# Altium PCB MB1360.PcbDoc (part 3 of 3)
Units mil, origin at the board's own origin, x right, y up, seen from the top; angles counter-clockwise.
Board outline 2760.94 x 3253.06 mil, 2 copper layers (Top Layer, Bottom Layer), stack 61.811 mil thick; 138 components, 141 nets, 535 pads, 416 vias.
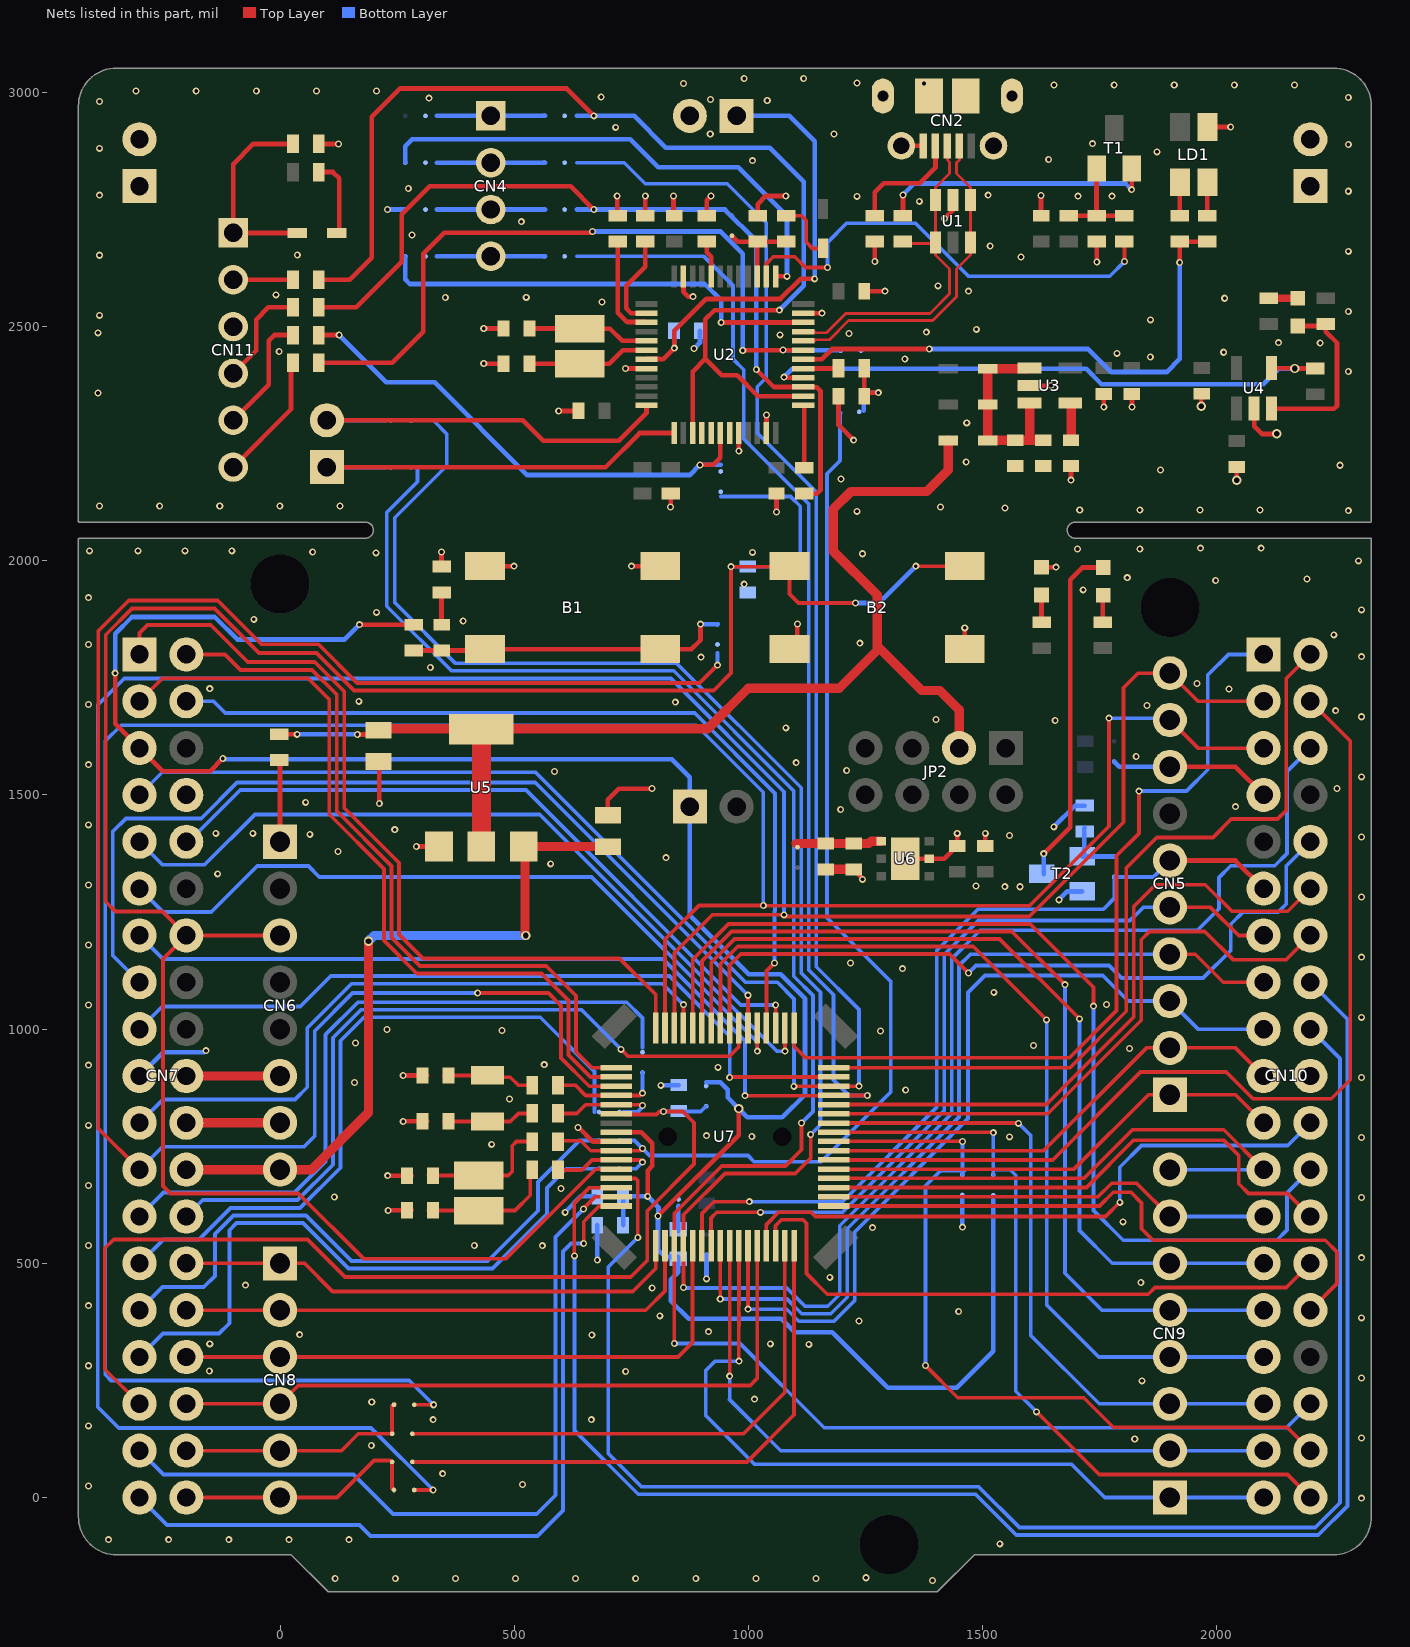
[diagram p2: the nets of this part, all layers, seen from the top]

## Via types
v1: diameter 15, hole 8, Top Layer to Bottom Layer, tented both sides, 398 vias
v2: diameter 20, hole 12, Top Layer to Bottom Layer, tented both sides, 18 vias

## Nets (pads, with @x,y where several pads share a name; then routed paths per layer and width w, separated by ;. In a path a pad name is that pad's centre, name@x,y a point inside that pad or via, vN(x,y) a via of type N, cw(c..) or ccw(c..) an arc to the next point about the centre after c; other vN are vias at no path point) (continued)
GND: B1.1 B1.2 B2.1 B2.2 C1.1 C2.1 C3.1 C4.1 C5.1 C6.1 C7.1 C8.2 C9.1 C10.1 C11.2 C12.1 C13.1 C14.1 C15.1 C17.1 C18.1 C19.1 C20.1 C21.1 C22.1 C23.1 C24.1 C25.1 C26.1 C27.2 C28.1 C30.1 C31.1 C32.1 CN2.5 CN2.6 CN2.7 CN2.8 CN2.9 CN2.10 CN2.11 CN6.6 CN6.7 CN7.8 CN7.19 CN7.20 CN7.22 CN10.20 CN11.3 JP1.2 JP4.1 JP4.2 JP5.1 JP5.2 LD1.1 LD3.2 R1.2 R3.1 R4.1 R5.1 R6.2 R8.2 R12.1 R21.1 R26.1 R35.2 SB10.2 SB30.2 SB31.1 T2.2 U1.2 U2.8 U2.20 U2.23 U2.35 U2.47 U3.2 U4.2 U5.1 U6.2 U6.EP U7.9 | length 3603.9
  Top Layer w10: R1.2@86.5,2890 v1(125,2890) ; C17.1@210,1571.54 212,1569.54 v1(212,1482.01) ; v1(230,687) C25.1@271.44,687 C25.1@281.28,687 ; v1(231,613) C26.1@271.44,613 C26.1@281.28,613 ; v1(263,803) C24.1@304.44,803 C24.1@314.28,803 ; v1(263,901) C23.1@304.44,901 C23.1@314.28,901 ; v1(291,1390) U5.1@337,1390 ; R26.1@345,1987.56 v1(345,2019) ; v1(435,2421) C5.1@477.44,2421 C5.1@485.32,2421 ; v1(435,2496) C4.1@477.44,2496 C4.1@485.32,2496 ; B1.1@437.99,1988.58 v1(499.58,1988.58) ; v1(595,2320) C10.1@633.5,2320 ; v1(636,790) 638.04,790 668.02,760.02 U7.9@698.75,760.02 ; C18.1@700,1456.46 700,1490.02 723,1513.02 793.02,1513.02 v1(794,1514) ; R3.1@720,2740.5 v1(720,2779) ; v1(737.53,2410.47) U2.8@782.68,2410.47 ; v1(750.42,1988.58) B1.2@812.01,1988.58 ; R4.1@780,2740.5 v1(780,2779) ; v1(834,2115) R21.1@834,2143.44 ; C1.1@840,2740.5 v1(840,2779) ; U2.47@861.42,2607.32 861.42,2575.04 862.23,2574.22 862.23,2573.57 871.8,2564 v1(881.63,2564) ; R5.1@911,2736.56 911,2770 v1(920,2779) ; v1(979.53,2234.17) U2.20@979.53,2272.68 ; R6.2@1020,2736.56 1020,2761.53 1037.47,2779 v1(1080,2779) ; U2.23@1038.58,2272.68 v1(1038.58,2311.18) ; v1(1060,2104) C15.1@1060,2139.5 ; B2.2@1104.72,1811.42 v1(1104.72,1865.28) ; U2.35@1117.32,2528.58 v1(1157.12,2528.58) ; C11.2@1192.44,2351 1192.44,2290 v1(1224.87,2257.56) ; C19.1@1225,1341.13 1243.5,1322.63 v1(1243.5,1320) ; C2.1@1251.5,2575.68 v1(1292,2575.68) ; v1(1270,2639) R8.2@1270,2677.5 ; CN2.7@1326.57,2886 CN2.5@1373.82,2886 ; v1(1335,1363.69) U6.2@1386.18,1363.69 1418.44,1363.69 C21.1@1446,1391.24 v1(1446,1418) ; v1@1419,2730 v1(1419,2731) 1437,2749 U1.2@1437,2770.28 U1.2@1437,2772.24 ; B2.1@1462.01,1811.42 v1(1462.01,1856.99) ; C22.1@1506,1391.24 v1(1506,1418) ; U3.2@1598.73,2374 U3.2@1600.7,2374 v1(1646,2374) ; LD3.2@1622.77,1983 LD3.2@1626,1986.23 v1(1657,1986.23) ; C3.1@1625,2740.5 v1(1625,2780) ; v1(1688.87,2172.13) C14.1@1688.87,2202.38 ; v1(1744,2638) R12.1@1744,2677.5 ; v1(1759.02,2328.45) C7.1@1759.02,2356.38 ; v1(1819.02,2328.61) C6.1@1819.02,2356.38 ; v2(1966.98,2330.02) C8.2@1966.98,2356.44 ; LD1.1@1979.53,2926.05 v1(2029.94,2926.05) ; v2(2043,2172) C9.1@2043,2200.44 ; U4.2@2080,2324.69 2080,2286.88 2096.1,2270.78 2128,2270.78 v2(2128,2271)
  Top Layer w20: CN7.22@-200,800 CN6.7@0,800 ; CN7.20@-200,900 CN6.6@0,900 ; C20.1@1165,1341.13 C19.1@1225,1341.13
  Bottom Layer w10: CN7.19@-300,900 -249.42,950.58 -161.42,950.58 v1(-158,954) ; v1(229.54,2750) SB10.2@267.25,2750 ; v1(609,609) 609,609.53 642.47,643 C31.1@673.5,643 ; v1(677.44,507) C32.1@677.44,581.62 ; v1@813.56,880.5 C30.1@851,880.5 ; v1(884,2453) 896.56,2465.56 C27.2@896.56,2491 ; v1(910.75,467) SB31.1@910.75,518.28 ; v1(1457,577.1) 1457,636.15 ; v1(1652.27,1432) 1697.45,1477.18 R35.2@1718,1477.18 ; v1(1663,1276) 1681,1294 T2.2@1713,1294
  other v1: 1393,-177 117.82,-173 246.16,-173 374.49,-173 502.83,-173 631.17,-173 759.5,-173 887.84,-173 1016.17,-173 1144.51,-173 1251,-171.34 1537.02,-99 -366,-90 -237.66,-90 -109.33,-90 19.01,-90 147.34,-90 2309,-1.36 -409,24.64 518,28 347.33,50.9 195,110.9 1825,125 2309,126.97 -409,152.97 327.01,166.22 664.77,166.22 195.91,204.05 1013,210 1840.67,249 2309,255.31 738,269 -151,270 -409,281.31 1129,327 -150,328 1047,328 665.77,346.8 42,347.6 915,354 1236,377 2309,383.64 811,388 1449,397 -409,409.64 794.53,447.5 -73.65,453.27 1838,459 1174,470 2309,511.98 -409,537.98 415,538 560,537.74 1265,576 1800,588.7 2309,640.32 116,641.53 600,660 -409,666.32 452,754 2309,768.65 1557.72,770 1007.38,771 910.77,772.42 -409,794.65 489.77,850.6 1336,870 813,879.94 159,886 2309,896.99 934.92,918.53 -409,922.99 564.2,924 1813.77,958.71 1609,965 161.37,970.42 1282,996 474,997 228.58,999 2309,1025.32 -409,1051.32 1764.49,1052.53 1524,1078.63 1329,1129 1218,1141 2309,1153.66 -409,1179.66 2309,1281.99 1547.48,1304.12 1580,1304 1486.14,1305.37 -409,1307.99 -132.96,1331.68 578,1353 824.06,1366 124,1379.44 2309,1410.33 1557.72,1413.41 63.58,1416 -137,1418 -58,1418 245,1425.83 -409,1436.33 1197,1469 2040,1475 54.93,1484.18 2257,1514 2309,1538.66 586,1550 1210,1552 -409,1564.66 1102.11,1569 1828,1582 1079.92,1643.46 1655,1659 1400.38,1661 2309,1667 2254,1680 1850.97,1690.79 -409,1693 844,1698 168.18,1700 2026.41,1726 -150,1727 1958,1738 321,1772 899,1794.1 2309,1795.34 -409,1821.34 1238,1824 2250,1842 391,1871.5 -56,1875 206,1890 2309,1895.34 -409,1921.34 1715,1938 991,1950 1997.92,1958 2193,1960.98 1809,1964 2303,2000 1243.5,2015 205,2017 1009,2018 69.65,2019 -407,2021.34 -303,2021.34 -203,2021.34 -103,2021.34 1703,2025 1835.91,2025 1965.49,2027 2095,2027 1231.77,2105.53 2281,2107 1707.57,2108.68 1835.91,2108.68 1964.25,2108.68 2092.58,2108.68 1548.04,2112.53 1410.18,2115 -385.34,2117 -257.01,2117 -128.67,2117 -0.34,2117 128,2117 1197.54,2174.53 1880,2193.87 2263.45,2204 1465,2210.8 1466.29,2294.48 -388.43,2358.34 2281,2403.99 1334,2431 1858.15,2435.09 1786.97,2442.95 2015,2445.25 -1.77,2447 2221,2465 2131.68,2465.65 1067.77,2482.53 1215.04,2485.28 -388.43,2486.67 1380,2488.13 1486.72,2494.15 1858.73,2514.53 -385.43,2524.01 2281,2532.33 687.77,2552.53 2017,2560.56 352.87,2562 525.77,2562.43 -8.43,2567.95 1470.03,2575.68 1405,2587 1582.21,2648.53 -385.43,2652.34 36.87,2652.94 2281,2660.66 1516.28,2672.07 282,2695.74 515.26,2724 1365,2767.57 1232,2778.17 1703.77,2778.53 1776.51,2778.53 -385.43,2780.68 1512,2780.68 2281,2789 274,2795 1008.94,2854.34 1641.29,2857 1872.7,2873.25 -385.43,2880.68 2281,2889 1734.77,2890.53 918.64,2911.2 1182.62,2911.2 716.77,2925.53 -385.43,2980.68 1040.32,2982.75 919.35,2985 317.99,2987.62 2281,2989 685.8,2990 -307.34,3003 -179.01,3003 -50.67,3003 77.66,3003 206,3003 1652.66,3016 1780.99,3016 1909.33,3016 2037.66,3016 2166,3016 861.66,3019 1375,3019 1232,3020 991,3030 1118,3030
LED_STLK: R14.1 R15.1 U2.30 | length 1176.4
  Top Layer w10: v1(1386.32,2452) 1178.7,2452 1156.85,2430.16 1143.63,2430.16 ; v1(1921,2637) R14.1@1921,2677.5 ; R14.1@1921,2681.44 R15.1@1980,2681.44 ; 1143.63,2430.16 U2.30@1117.32,2430.16 1143.63,2430.16
  Bottom Layer w10: v1(1386.32,2452) 1726,2452 1775,2403 1893,2403 1921,2431 v1(1921,2637)
NetB1_3: B1.3 B1.4 C16.2 R29.1 SB20.2 | length 683
  Top Layer w10: R29.1@290,1808.5 B1.3@451.81,1808.5 ; B1.3@454.72,1811.42 B1.4@812.01,1811.42 878.42,1811.42 897.88,1830.88 v1(897.88,1864.62)
  Bottom Layer w10: v1(897.88,1864.62) SB20.2@934.11,1864.62
NetC11_1: C11.1 R20.2 SB17.1 | length 155.6
  Top Layer w10: R20.2@1247.56,2411 C11.1@1247.56,2351 1255.56,2359 v1(1277.48,2359)
  Bottom Layer w10: 1246.09,2321 1246.09,2347.09 1258,2359 v1(1277.48,2359)
NetC12_2: C12.2 C13.2 D3.2 D4.2 D5.2 U3.1 U3.3 | length 436.5
  Top Layer w16: U3.3@1596.13,2334 U3.3@1598.73,2336.6 ; U3.3@1600.7,2336.6 U3.3@1601,2336.3 ; C13.2@1629.31,2257 C13.2@1629.87,2257.56
  Top Layer w20: D3.2@1511.13,2410 D5.2@1511.13,2334 D4.2@1511.13,2257 1601,2257 ; D3.2@1516.24,2410 U3.1@1597.33,2410 ; U3.3@1601,2336.3 1601,2257 ; C13.2@1629.31,2257 1601,2257
NetC14_2: C14.2 U3.4 | length 75.2
  Top Layer w20: C14.2@1689.28,2261.43 U3.4@1689.28,2336.6
NetC16_1: C16.1 R26.2 | length 57
  Top Layer w10: C16.1@345,1871.5 R26.2@345,1928.5
NetC19_2: C19.2 C20.2 SB1.1 U6.4 | length 183.6
  Top Layer w20: 1102.24,1396.24 C20.2@1165,1396.24 C19.2@1225,1396.24 1257.24,1396.24 1262.09,1401.09 U6.4@1283.82,1401.09
NetC23_2: C23.2 R31.2 X2.2 | length 188
  Top Layer w8: C23.2@349.72,901 C23.2@359.56,901 442.79,901 X2.2@443,901.21 ; X2.2@443,897.21 491.79,897.21 509,880 R31.2@530.5,880
NetC24_2: C24.2 R32.2 X2.1 | length 201.6
  Top Layer w8: C24.2@349.72,803 C24.2@359.56,803 442.79,803 X2.1@443,802.79 491.79,802.79 509,820 R32.2@530.5,820 ; R32.2@534.5,824 R32.2@530.5,820 ; R32.2@538.44,820 R32.2@530.5,820
NetC25_2: C25.2 R33.2 X3.2 | length 280.2
  Top Layer w8: C25.2@316.72,687 317.12,687.4 X3.2@424.5,687.4 487.4,687.4 496,696 496,751 505,760 R33.2@534.5,760
NetC26_2: C26.2 R34.2 X3.1 | length 286.1
  Top Layer w8: C26.2@316.72,613 317.12,612.6 X3.1@424.5,612.6 501.6,612.6 534.5,645.5 R34.2@534.5,700
NetCN2_4: CN2.4 R8.1 | length 244
  Top Layer w10: R8.1@1270,2740.5 1270,2787 1289,2806 1366,2806 1399.41,2839.41 CN2.4@1399.41,2885.79
NetCN4_1: CN4.1 SB6.1 SB7.2 | length 231.5
  Bottom Layer w10: 334.75,2950 CN4.1@450,2950 SB7.2@566.25,2950
NetCN4_2: CN4.2 SB8.1 SB9.2 | length 231.5
  Bottom Layer w10: 334.75,2850 CN4.2@450,2850 SB9.2@566.25,2850
NetCN4_3: CN4.3 SB10.1 SB11.2 | length 231.5
  Bottom Layer w10: 334.75,2750 CN4.3@450,2750 SB11.2@566.25,2750
NetCN4_4: CN4.4 SB12.1 SB13.2 | length 231.5
  Bottom Layer w10: 334.75,2650 CN4.4@450,2650 SB13.2@566.25,2650
NetCN5_8: CN5.8 CN10.7 SB21.1 | length 348.6
  Top Layer w10: CN5.8@1900,1560 2040,1560 CN10.7@2100,1500
  Bottom Layer w10: SB21.1@1781,1571.38 1792.38,1560 CN5.8@1900,1560
NetCN6_1: CN6.1 R30.2 | length 175.3
  Top Layer w10: R30.2@-2,1574.44 0,1572.44 CN6.1@0,1400
NetCN7_25: CN7.25 SB23.2 | length 1499.7
  Bottom Layer w8: CN7.25@-300,600 -249,651 30.75,651 97,717.25 97,988.25 166.25,1057.5 740.5,1057.5 774,1024 774,960.47
NetCN7_27: CN7.27 SB24.2 | length 1482.5
  Bottom Layer w8: CN7.27@-300,500 -249,551 -173,551 -106,618 43,618 129,704 129,975 179.5,1025.5 555.5,1025.5 671.53,909.47 671.53,823
NetCN7_29: CN7.29 SB25.2 | length 1299.9
  Bottom Layer w8: CN7.29@-300,400 -250.68,449.31 -162.68,449.31 -139,473 -139,562.37 -99.37,602 55.63,602 152.63,505 443.58,505 551,612.42 551,673.63 639.37,762 SB25.2@681.38,762
NetCN7_31: CN7.31 SB27.2 | length 1379.7
  Bottom Layer w8: CN7.31@-300,300 -250,350 -130,350 -108,372 -108,570.75 -92.75,586 49,586 146,489 453.62,489 570,605.38 570,660.69 611.31,702 SB27.2@684,702
NetCN7_36: CN7.36 CN8.5 SB2.1 SB4.2 | length 520.3
  Top Layer w8: CN7.36@-200,100 CN8.5@0,100 131,100 167,136 SB4.2@239.38,136 239.38,195.06 SB2.1@244.32,200
NetCN7_38: CN7.38 CN8.6 SB3.2 SB5.1 | length 529.4
  Top Layer w8: CN7.38@-200,0 CN8.6@0,0 122,0 201,79 235,79 ; SB3.2@239.38,76 239.38,19.94 SB5.1@243.32,16
NetCN11_1: CN11.1 D1.1 R1.1 | length 420.1
  Top Layer w10: R1.1@23.5,2890 -57,2890 -100,2847 CN11.1@-100,2700 D1.1@31.76,2700
NetCN11_2: CN11.2 R9.1 | length 123.5
  Top Layer w10: CN11.2@-100,2600 R9.1@23.5,2600
NetCN11_4: CN11.4 R16.1 | length 220.6
  Top Layer w10: CN11.4@-100,2400 -51,2449 -51,2515 -25,2541 R16.1@23.51,2541
NetCN11_5: CN11.5 R17.1 | length 254
  Top Layer w10: CN11.5@-100,2300 -24,2376 -24,2470 -12,2482 R17.1@23.51,2482
NetCN11_6: CN11.6 R19.1 | length 274.2
  Top Layer w10: CN11.6@-100,2200 23.51,2323.51 R19.1@23.51,2423
NetD1_2: D1.2 R2.1 | length 162
  Top Layer w10: R2.1@86.5,2830 113,2830 126.24,2816.76 D1.2@126.24,2700
NetD2_2: D2.2 R7.1 | length 133.7
  Top Layer w8: R7.1@1081,2736.56 1113.3,2736.56 1123.57,2726.29 1123.57,2680.46 1137.15,2666.87 D2.2@1159,2666.87
NetL1_2: L1.2 SB28.1 | length 54.2
  Bottom Layer w10: L1.2@850,568.5 L1.2@850,572.5 850,621.25 851,622.25
NetLD1_2: LD1.2 R15.2 | length 67.6
  Top Layer w10: LD1.2@1979.53,2807.94 1979.53,2740.97 R15.2@1980,2740.5
NetLD1_3: LD1.3 R14.2 | length 66.9
  Top Layer w10: R14.2@1921,2740.5 LD1.3@1921,2807.42
NetLD2_1: LD2.1 R18.1 | length 62
  Top Layer w16: R18.1@2111,2560.56 LD2.1@2172.97,2560.56
NetLD2_2: LD2.2 R36.1 U4.3 | length 386.2
  Top Layer w10: U4.3@2117.4,2324.69 2250.4,2324.69 2257,2331.29 2257,2465 2232.64,2489.36 R36.1@2232.64,2501.47 ; LD2.2@2173,2501.47 R36.1@2232.64,2501.47 ; R36.1@2232.64,2505.44 R36.1@2232.64,2501.47
NetLD3_1: LD3.1 R27.2 | length 58.6
  Top Layer w10: R27.2@1626,1868.56 LD3.1@1626,1927.17
NetLD4_1: LD4.1 R28.1 | length 58
  Top Layer w10: R28.1@1757,1868.86 1757,1925.47 LD4.1@1758,1926.47
NetLD4_2: LD4.2 T2.3 | length 733.5
  Top Layer w10: v1(1630.69,1374.69) 1687,1431 1687,1959.31 1713.21,1985.53 LD4.2@1758,1985.53
  Bottom Layer w10: T2.3@1630.69,1331 v1(1630.69,1374.69)
NetR3_2: R3.2 U2.3 | length 221.5
  Top Layer w10: R3.2@721,2681.44 721,2530 741.32,2509.68 U2.3@780,2509.68 ; U2.3@780,2508.9 U2.3@782.68,2508.9
NetR4_2: R4.2 U2.2 | length 207.4
  Top Layer w10: R4.2@780,2681.44 780,2628 739,2587 739,2539 749.42,2528.58 U2.2@782.68,2528.58
NetR5_2: R5.2 U2.44 | length 78
  Top Layer w10: R5.2@911,2681.44 911,2658.47 920.47,2649 U2.44@920.47,2607.32
NetR6_1: R6.1 R7.2 SB15.2 U2.39 | length 189.3
  Top Layer w10: SB15.2@965,2694.09 977.65,2681.44 R6.1@1020,2681.44 R7.2@1080,2681.44 ; U2.39@1018.9,2607.32 R6.1@1018.9,2676.4
NetR10_2: R10.2 T1.2 | length 595.8
  Top Layer w10: R10.2@1330,2740.5 v1(1330,2781) ; v1@1817,2791 v1(1818.4,2792.4) T1.2@1818.4,2837.69 ; T1.2@1820.58,2837.69 T1.2@1820.58,2841.63
  Bottom Layer w10: v1(1330,2781) 1354.58,2805.58 1805.22,2805.58 v1(1818.4,2792.4)
NetR11_1: R11.1 R12.2 R13.1 T1.1 | length 224.1
  Top Layer w10: R11.1@1684,2736.56 R13.1@1803,2736.56 ; R12.2@1743.42,2736.56 T1.1@1743.42,2841.63
NetR20_1: R20.1 U2.29 | length 75.3
  Top Layer w10: U2.29@1117.32,2410.47 1191.91,2410.47 R20.1@1192.44,2411
NetR35_1: R35.1 SB22.1 T2.1 | length 130.2
  Bottom Layer w10: T2.1@1713,1368.8 T2.1@1717.31,1368.8 ; T2.1@1717.31,1368.4 T2.1@1717.31,1368.8 ; R35.1@1718,1430.13 1717.31,1429.43 T2.1@1717.31,1368.8 ; SB22.1@1781,1368.31 1780.5,1368.8 T2.1@1717.31,1368.8
NetSB14_2: SB14.2
OSC_IN: C4.2 U2.5 X1.1 | length 268.1
  Top Layer w10: C4.2@524.69,2496 C4.2@532.56,2496 X1.1@639.4,2496 ; X1.1@640,2495.4 704.6,2495.4 730.47,2469.53 U2.5@782.68,2469.53
OSC_OUT: C5.2 U2.6 X1.2 | length 269.7
  Top Layer w10: C5.2@524.69,2421 C5.2@532.56,2421 X1.2@639.6,2421 ; X1.2@640,2420.6 702.6,2420.6 731.84,2449.84 U2.6@782.68,2449.84
PA0: CN7.28 CN8.1 U7.17 | length 1095.9
  Top Layer w8: CN7.28@-200,500 CN8.1@0,500 52.35,500 112.35,440 753,440 802.23,489.23 U7.17@802.23,537.66
PA1: CN7.30 CN8.2 U7.18 | length 1135.6
  Top Layer w8: CN7.30@-200,400 CN8.2@0,400 781,400 821.91,440.91 U7.18@821.91,537.66
PA2: CN10.34 SB18.1 U7.19 | length 4209.3
  Top Layer w8: U7.19@841.6,537.66 841.5,537.56 841.5,329.5 v1(842,329) ; U7.19@841.73,537.72 841.73,606.54 943.19,708 1079,708 1113.5,742.5 v1(1113.5,799.5)
  Bottom Layer w8: 293.75,2200 293.75,2168.75 228,2103 228,1903 366,1765 840.63,1765 1096.86,1508.77 1096.86,1113.14 1138,1072 1138,824 v1(1113.5,799.5) ; v1(842,329) 982,329 1162,149 2149,149 CN10.34@2200,200
PA3: CN10.6 SB16.1 U7.20 | length 5075.5
  Top Layer w8: U7.20@861,537.38 U7.20@861.28,537.66 ; v1(861.42,448.14) U7.20@861.42,537.72 861.42,603.6 949.82,692 1100,692 1133,725 v1(1133,775)
  Bottom Layer w8: 293.75,2300 327,2300 356,2271 356,2203 245,2092 245,1911 375,1781 847.25,1781 1112.86,1515.4 1112.86,1119.77 1154,1078.63 1154,796 v1(1133,775) ; v1(861.42,448.14) 862.06,447.5 1081.78,447.5 1120.78,408.5 1169.5,408.5 1195,434 1195,580.25 1434,819.25 1434,1150 1495,1211 1959,1211 2005,1257 2005,1324 2030,1349 2124,1349 2150,1375 2150,1550 CN10.6@2200,1600
PA4: CN7.32 CN8.3 U7.21 | length 1300.5
  Top Layer w8: CN7.32@-200,300 CN8.3@0,300 849.97,300 880.97,331 U7.21@880.97,537.66
PA5: CN5.6 CN10.11 SB22.2 U7.22 | length 1825.4
  Top Layer w8: U7.22@900.79,537.72 900.79,606.21 926.17,631.6 v1(1002,631.6)
  Top Layer w10: CN5.6@1900,1360 CN5.6@1900,1360 2040,1360 CN10.11@2100,1300
  Bottom Layer w8: v1(1002,631.6) 1201.09,631.6 1402,832.51 1402,1167.17 1490.62,1255.79 1758,1255.79 1781,1278.79 SB22.2@1781,1322.38 ; SB22.2@1781,1325 1865,1325 CN5.6@1900,1360
PA6: CN5.5 CN10.13 U7.23 | length 1733.2
  Top Layer w8: U7.23@920.47,537.72 920.47,596.8 932.68,609 v1(1026,609) ; CN5.5@1900,1260 1987,1260 2047,1200 CN10.13@2100,1200
  Bottom Layer w8: v1(1026,609) 1201.12,609 1418,825.88 1418,1158.87 1491.13,1232 1815,1232 1843,1260 CN5.5@1900,1260
PA7: CN5.4 CN10.15 U7.24 | length 1904.7
  Top Layer w8: v1(940,424) 940,537.56 U7.24@940.16,537.72 ; CN5.4@1900,1160 1954,1160 2014,1100 CN10.15@2100,1100
  Bottom Layer w8: v1(940,424) 1082.65,424 1114.15,392.5 1176.13,392.5 1211,427.37 1211,573.63 1450,812.63 1450,1136 1474,1160 CN5.4@1900,1160
PA8: CN9.8 CN10.23 U7.36 | length 1195.8
  Top Layer w8: U7.36@1182.28,681.42 1716.42,681.42 1820,785 2015,785 CN10.23@2100,700
  Bottom Layer w8: CN9.8@1900,700 CN10.23@2100,700
PA9: CN5.1 CN10.21 U7.37 | length 1008.4
  Top Layer w8: U7.37@1182.28,701.1 1695.38,701.1 1854.27,860 CN5.1@1900,860 2040,860 CN10.21@2100,800
PA10: CN9.3 CN10.33 U7.42 | length 1416.3
  Top Layer w8: U7.42@1182.34,799.39 1576.41,799.39 v1(1576.8,799)
  Bottom Layer w8: v1@1576.41,799 v1@1576.41,799.39 ; v1(1576.8,799) 1603,772.8 1603,346 1749,200 CN9.3@1900,200 CN10.33@2100,200
PA11: CN10.14 U7.43 | length 1325.8
  Top Layer w8: U7.43@1182.28,819.21 1639.09,819.21 1839,1019.12 1839,1191 1856.42,1208.42 1974.58,1208.42 2034.58,1148.42 2148.42,1148.42 CN10.14@2200,1200
PA12: CN10.12 U7.44 | length 1394.2
  Top Layer w8: U7.44@1182.28,838.9 1636.15,838.9 1823,1025.75 1823,1262 1869.42,1308.42 1975.58,1308.42 2032.42,1251.58 2151.58,1251.58 CN10.12@2200,1300
PA13: CN7.13 SB13.1 U7.45 | length 3994.3
  Top Layer w8: v1(993,858) 1181.9,858 1182.34,858.45 v1(1253.97,858.45)
  Bottom Layer w8: CN7.13@-300,1200 -250,1150 817.63,1150 993,974.63 v1(993,858) ; 633.75,2650 905,2650 967,2588 967,2430.91 990,2407.91 990,2260 1128.86,2121.14 1128.86,1126.4 1182,1073.25 1182,891.45 1215,858.45 v1(1253.97,858.45)
PA14: CN7.7 SB9.1 U7.46 | length 4343
  Top Layer w8: v1(1097,878) 1236,878 v1(1236.13,878.13)
  Bottom Layer w8: CN7.7@-300,1500 -251.58,1548.42 545.58,1548.42 994,1100 1061.92,1100 1097.59,1064.33 1097.59,878.59 v1(1097,878) ; 633.75,2850 735,2850 780,2805 955,2805 1038.28,2721.72 1038.28,2391 1019.08,2371.8 1019.08,2272.92 1144.86,2147.14 1144.86,1133.02 1236,1041.88 1236,878.26 v1(1236.13,878.13)
PA15: CN7.17 U7.47 | length 1670.5
  Top Layer w8: v1@960,897.81 U7.47@1182.34,897.81
  Bottom Layer w8: CN7.17@-300,1000 -251.58,1048.42 43.42,1048.42 108.37,1113.37 831.63,1113.37 960,985 v1(960,897)
PB0: CN5.3 CN10.17 U7.27 | length 1844
  Top Layer w8: v1(999,402) 999,537.5 U7.27@999.21,537.72
  Bottom Layer w8: v1(999,402) 1082.03,402 1107.53,376.5 1182.75,376.5 1227,420.75 1227,567 1469,809 1469,1078.5 1505,1114.5 1756.5,1114.5 1811,1060 CN5.3@1900,1060 1960,1000 CN10.17@2100,1000
PB1: CN7.34 CN8.4 U7.28 | length 1524.9
  Top Layer w8: CN7.34@-200,200 -16,200 CN8.4@-16,184 ; CN8.4@0,200 39,239 1004,239 1018.76,253.76 U7.28@1018.76,537.66
PB2: CN10.22 U7.29 | length 1348.1
  Top Layer w8: U7.29@1038.44,537.66 1038.44,583.07 1064.37,609 1134,609 1143,600 1762.65,600 v1(1793,630.35)
  Bottom Layer w8: v1(1793,630.35) 1793,705.13 1839.46,751.58 2151.58,751.58 CN10.22@2200,800
PB3: CN9.4 CN10.31 U7.57 | length 2032.1
  Top Layer w8: U7.57@940.3,1002.34 940.3,1139.55 977.25,1176.5 1480,1176.5 v1(1636.5,1020) v1@1637.16,1020
  Bottom Layer w8: v1@1637.16,1020 1637.16,410.84 1748,300 CN9.4@1900,300 CN10.31@2100,300
PB4: CN9.6 CN10.27 U7.58 | length 1891.9
  Top Layer w8: U7.58@920.61,1002.34 920.61,1142.49 970.62,1192.5 1536.5,1192.5 v1(1707,1022)
  Bottom Layer w8: v1(1707,1022) 1707,570 1777,500 CN9.6@1900,500 CN10.27@2100,500
PB5: CN9.5 CN10.29 U7.59 | length 2064
  Top Layer w8: U7.59@900.93,1002.34 900.93,1145.43 963.99,1208.5 1562.5,1208.5 v1(1676,1095)
  Bottom Layer w8: v1(1676,1095) 1676,479 1755,400 CN9.5@1900,400 CN10.29@2100,400
PB6: CN10.24 U7.60 | length 2164
  Top Layer w8: U7.60@881.24,1002.34 881.24,1148.38 957.36,1224.5 1601.82,1224.5 1737,1089.31 v1(1737,1049)
  Bottom Layer w8: v1(1737,1049) 1737,612.75 1800.5,549.25 2128.41,549.25 2150,570.84 2150,650 CN10.24@2200,700
PB7: CN7.21 U7.61 | length 1427.2
  Top Layer w8: U7.61@861.56,1002.34 v1(861.56,1052.29)
  Bottom Layer w8: CN7.21@-300,800 -250,850 32,850 58,876 58,1002.63 152.37,1097 816.84,1097 v1(861.56,1052.29)
PB8: CN5.10 CN10.3 SB5.2 U7.62 | length 6012.1
  Top Layer w8: SB5.2@286.62,16 v1(327,16) ; U7.62@841.87,1002.34 U7.62@842.06,1002.53 ; U7.62@842.06,1032.53 842.06,1163.05 923,1244 v1(1076,1244) 1079.5,1240.5 1599.92,1240.5 1801,1441.58 1801,1729 1832,1760 CN5.10@1900,1760 1960,1700 CN10.3@2100,1700
  Bottom Layer w8: v1(327,16) 194.58,148.42 -344.42,148.42 -389,193 -389,1691.9 -332.48,1748.42 834.58,1748.42 1076,1507 v1(1076,1244)
PB9: CN5.9 CN10.5 SB2.2 U7.63 | length 5630.8
  Top Layer w8: 293,198 v1(328,198) ; U7.63@822.18,1032.34 822.18,1191.89 894.3,1264 v1(1032,1264) 1032.5,1263.5 1600.3,1263.5 1770,1433.2 v1(1770,1664) ; CN5.9@1900,1660 1960,1600 CN10.5@2100,1600
  Bottom Layer w8: v1(328,198) 276,250 -361,250 -373,262 -373,1615 -338.94,1649.06 44.64,1649.06 44.7,1649 888.75,1649 1032,1505.75 v1(1032,1264) ; v1(1770,1664) 1896,1664 CN5.9@1900,1660
PB10: CN10.28 U7.30 | length 1345.7
  Top Layer w8: U7.30@1058.13,537.66 1058.13,580.13 1071,593 1116.65,593 1124,585.65 1124,478.35 1168.35,434 1854,434 1868.42,448.42 2148.42,448.42 CN10.28@2200,500
PB11: SB4.1 U7.31 | length 1175.2
  Top Layer w8: SB4.1@282.68,136 989.83,136 1077.82,223.98 U7.31@1077.82,567.66
PB12: SB3.1 U7.32 | length 1241.3
  Top Layer w8: 289,76 997,76 1097.5,176.5 U7.32@1097.5,567.66
PB13: CN10.30 U7.33 | length 1319.5
  Top Layer w8: U7.33@1182.28,622.36 1749.78,622.36 1779,651.58 1816.73,651.58 1839.32,629 1839.32,573.93 1864,549.25 2231.75,549.25 2257,524 2257,457 CN10.30@2200,400
PB14: CN9.7 CN10.25 U7.34 | length 986.1
  Top Layer w8: U7.34@1182.28,642.05 1724.67,642.05 1746.84,642.05 1775.79,671 1829,671 CN9.7@1900,600 ; CN10.25@2073,600 CN10.25@2100,600
  Bottom Layer w8: CN9.7@1900,600 CN10.25@2100,600
PB15: CN10.26 U7.35 | length 1162.5
  Top Layer w8: U7.35@1182.28,661.73 1721.73,661.73 1823,763 2014.37,763 2047,730.37 2047,670 2068,649 2151,649 CN10.26@2200,600
PC0: CN10.18 U7.13 | length 3343.9
  Top Layer w8: U7.13@717.66,681.28 759.35,681.28 764,676.63 v1(764,555)
  Bottom Layer w8: v1(764,555) 701,492 701,93.63 771.63,23 1491.63,23 1578.63,-64 2210.37,-64 2263,-11.37 2263,937 CN10.18@2200,1000
PC1: CN10.16 U7.14 | length 3507.7
  Top Layer w8: v1(629,516) 628.5,516.5 628.5,629.03 661.07,661.6 U7.14@717.66,661.6
  Bottom Layer w8: v1(629,516) 629,143 765,7 1485,7 1572,-80 2217,-80 2279,-18 2279,1021 CN10.16@2200,1100
PC2: CN7.35 U7.15 | length 1677.5
  Top Layer w8: v1(648,616) 648,617.29 672.62,641.91 U7.15@717.66,641.91
  Bottom Layer w8: CN7.35@-300,100 -249,49 157.17,49 241.17,-35 548,-35 588,5 588,556 v1(648,616)
PC3: CN7.37 U7.16 | length 1685.8
  Top Layer w8: v1@649,541.91 v1(648.34,542.56) 648.34,588.94 655.9,596.5 656.08,596.5 667.5,607.92 667.5,608.1 681.63,622.23 U7.16@708,622.23
  Bottom Layer w8: CN7.37@-300,0 -241.34,-58.66 169.66,-58.66 193,-82 550,-82 604,-28 604,525 621.56,542.56 v1(648.34,542.56)
PC4: CN9.2 CN10.35 U7.25 | length 1514.1
  Top Layer w8: U7.25@959.84,537.72 960,537.56 v1(960,259)
  Bottom Layer w8: v1(960,259) 960,209.31 959.84,209.16 1069,100 CN9.2@1900,100 CN10.35@2100,100
PC5: CN9.1 CN10.37 U7.26 | length 1686.4
  Top Layer w8: U7.26@979.53,537.72 980,537.24 980,410.58 979.5,410.08 979.5,393.92 980,393.42 980,366.58 979.71,366.29 979.71,291.29 v1(980,291)
  Bottom Layer w8: v1(980,291) 929,291 909,271 909,174.84 1012.84,71 1690,71 1761,0 CN9.1@1900,0 CN10.37@2100,0
PC6: CN10.4 U7.38 | length 2063.9
  Top Layer w8: U7.38@1182.28,720.79 1649.79,720.79 1837.42,908.42 2020.58,908.42 2077.42,851.58 2244.58,851.58 2285,892 2285,1615 CN10.4@2200,1700
PC7: CN5.2 CN10.19 U7.39 | length 1033.5
  Top Layer w8: U7.39@1182.28,740.47 1630.47,740.47 1850,960 CN5.2@1900,960 2040,960 CN10.19@2100,900
PC8: CN10.2 U7.48 | length 1727.3
  Top Layer w8: U7.48@1182.28,917.64 1686.64,917.64 1807,1038 1807,1344 1872,1409 1991.82,1409 2031.24,1448.42 2129.83,1448.42 2148.42,1467 2148.42,1748.42 CN10.2@2200,1800
PC9: CN10.1 U7.49 | length 1772.6
  Top Layer w8: U7.49@1097.77,1002.34 1097.77,963.22 1122,939 1685.37,939 1786,1039.63 1786,1370 1834,1418 v1(1834,1508)
  Bottom Layer w8: v1(1834,1508) 1834.42,1508.42 1935.42,1508.42 1981,1554 1981,1756 2025,1800 CN10.1@2100,1800
PC10: CN7.1 U7.64 | length 1789.1
  Top Layer w8: CN7.1@-300,1800 -300,1846 -283,1863 -148,1863 -69,1784 74,1784 137,1721 137,1472.25 254,1355.25 254,1202.25 305.25,1151 725,1151 802.5,1073.5 U7.64@802.5,1002.34
PC11: CN7.2 U7.1 | length 1588.6
  Top Layer w8: CN7.2@-200,1800 -117.5,1800 -84.5,1767 68.37,1767 121,1714.37 121,1465.63 238,1348.63 238,1195.63 298.63,1135 568.31,1135 632,1071.31 632,951.63 666.13,917.5 U7.1@717.66,917.5
PC12: CN7.3 U7.2 | length 1691.8
  Top Layer w8: CN7.3@-300,1700 -251,1749 60,1749 105,1704 105,1459 222,1342 222,1189 292,1119 558.24,1119 616,1061.24 616,945 663.18,897.82 U7.2@717.66,897.82
PC13: CN7.23 SB20.1 U7.3 | length 4103.4
  Top Layer w8: CN7.23@-300,700 -388,788 -388,1850.04 -323.04,1915 -132.96,1915 -39.72,1821.76 81.91,1821.76 164.67,1739 895.91,1739 v1(934.11,1777.2) ; v1(422,1077) 573,1077 600,1050 600,938.37 660.24,878.13 U7.3@717.66,878.13
  Bottom Layer w8: CN7.23@-300,700 -251,749 51,749 74,772 74,996 155,1077 v1(422,1077) ; v1(934.11,1777.2) 934.11,1803.6
PC14: R31.1 SB23.1 U7.4 | length 231.5
  Top Layer w8: R31.1@597.5,880 631,880 652.55,858.45 769.24,858.45 v1(774,863.21)
  Bottom Layer w8: v1(774,863.21) SB23.1@774,907.31
PC15: R32.1 SB24.1 U7.5 | length 233.9
  Top Layer w8: R32.1@597.5,820 633.79,820 652.55,838.76 771.32,838.76 v1@774,836.08
  Bottom Layer w8: 733,823 763,823 774,834 v1(774,837)
PD0: CN7.9 U7.50 | length 1701.6
  Top Layer w8: v1(1078.09,953) U7.50@1078.09,1002.34
  Bottom Layer w8: CN7.9@-300,1400 -251,1351 -161,1351 -53.5,1458.5 554.38,1458.5 983.13,1029.75 984.25,1029.75 1061,953 v1(1078.09,953)
PD1: CN7.10 U7.51 | length 1543.5
  Top Layer w8: U7.51@1058.41,1002.34 v1(1058.41,1051.69)
  Bottom Layer w8: CN7.10@-200,1400 -195.37,1400 -84.9,1510.47 525.04,1510.47 983.82,1051.69 v1(1058.41,1051.69)
PD2: CN7.4 U7.52 | length 1847.1
  Top Layer w8: U7.52@1038.72,1002.34 1039,1002.62 1039,1043.52 1038.91,1043.62 1038.91,1123.9 v1(1056,1141)
  Bottom Layer w8: CN7.4@-200,1700 -141.94,1700 -116.94,1675 885.37,1675 1057,1503.37 1057,1252.58 1056,1251.58 v1(1056,1141)
PD3: CN7.11 U7.53 | length 1605
  Top Layer w8: v1(1019.03,952.96) U7.53@1019.03,1002.34
  Bottom Layer w8: CN7.11@-300,1300 -250,1250 -147,1250 -48.58,1348.42 60.58,1348.42 84,1325 665.25,1325 976.51,1013.75 977.62,1013.75 1019.03,972.34 v1(1019.03,952.96)
PD4: CN7.15 U7.54 | length 2004.5
  Top Layer w8: v1(999,1072.37) 999,1002.69 U7.54@999.35,1002.34
  Bottom Layer w8: CN7.15@-300,1100 -357,1157 -357,1422 -329,1450 -168,1450 -91.53,1526.47 544.9,1526.47 v1(999,1072.37) v1@999,1071
PD5: CN7.26 U7.55 | length 1611.3
  Top Layer w8: v1(728,957) 743,942 960,942 979.67,961.66 U7.55@979.67,1002.34
  Bottom Layer w8: CN7.26@-200,600 -165,635 37.37,635 113,710.63 113,981.63 172.87,1041.5 643.5,1041.5 v1(728,957)
PD6: CN10.10 U7.56 | length 1619.7
  Top Layer w8: U7.56@959.98,1002.34 959.98,1136.61 983.87,1160.5 1429.5,1160.5 v1(1470,1120)
  Bottom Layer w8: v1(1470,1120) 1486,1136 1770,1136 1797,1109 1970.86,1109 2030,1168.14 2030,1224 2056,1250 2131.42,1250 2148.42,1267 2148.42,1348.42 CN10.10@2200,1400
PD8: CN10.36 SB30.1 U7.40 | length 1723.9
  Top Layer w8: U7.40@1182.34,760.02 1182.98,760.65 v1@1457,760.65 ; v1(1378,282) 1447,213 1716,213 1779,150 2150,150 CN10.36@2200,100
  Bottom Layer w8: v1(1378,282) 1378,665.42 1410.63,698.04 1457,698.04 ; SB30.1@1457,689.31 1457,698.04 ; v1(1457,760) 1457,698.04 ; 1462,698.04 1457,698.04
PD9: CN10.38 SB29.1 U7.41 | length 1672.6
  Top Layer w8: U7.41@1182.34,779.5 1182.34,779.71 v1@1523,779.71 ; v1(1615,183) 1749,49 2151,49 CN10.38@2200,0
  Bottom Layer w8: SB29.1@1523,688.69 1523,700 ; v1@1524,780 v1(1523,779) 1523,700 ; v1@1618,183 v1(1615,183) 1571,227 1571,688 1559,700 1523,700
PF0: R33.1 SB17.2 SB25.1 U7.10 | length 2367.7
  Top Layer w8: R33.1@597.5,761.89 642.11,761.89 663.66,740.34 769.24,740.34 v1(774,745.1)
  Bottom Layer w8: SB25.1@724.68,762 757.1,762 v1(774,745.1) 789.1,730 999,730 1012,717 1155,717 1304,866 1304,1102 1168,1238 1168,2186 1195.5,2213.5 SB17.2@1195.5,2315.72
  Bottom Layer w10: SB17.2@1193.22,2318 SB17.2@1195.5,2315.72
PF1: R34.1 SB27.1 U7.11 | length 234.2
  Top Layer w8: R34.1@597.5,699.1 644.52,699.1 666.08,720.65 769.24,720.65 v1(774,715.89)
  Bottom Layer w8: 733,702 760.11,702 v1(774,715.89)
PF2: B2.3 B2.4 C28.2 CN6.3 CN7.14 SB19.2 U7.12 | length 5360
  Top Layer w8: CN6.3@0,1200 CN7.14@-200,1200 ; U7.12@717.66,700.97 673.39,700.97 482.42,510 178,510 39,649 -234,649 -250,665 -250,1150 CN7.14@-200,1200 ; v1(1229,1910) 1107,1910 1087.99,1929.01 B2.4@1087.99,1988.58 1086.94,1987.53 v1(963.15,1987.53) 963.15,1760.15 926,1723 158.05,1723 78.05,1803 -45,1803 -140,1898 -316,1898 -372,1842 -372,1272 -351,1251 -251,1251 CN7.14@-200,1200 ; v1(1357.58,1988.58) B2.3@1462.01,1988.58
  Bottom Layer w8: 941,2137.25 1090.12,2137.25 1111,2116.37 1111,1999 1099.53,1987.53 C28.2@999,1987.53 v1(963.15,1987.53)
  Bottom Layer w10: v1(1229,1910) 1279,1910 v1(1357.58,1988.58)
PWR_ENN: R24.1 U2.28 U4.4 | length 1260.5
  Top Layer w10: v1(1076,2392) 1077.21,2390.79 U2.28@1117.32,2390.79 ; U4.4@2117.4,2411.31 2166,2411.31 v2(2166.75,2410.56) R24.1@2210,2410.56
  Bottom Layer w10: v1(1076,2392) 1094,2410 1721,2410 1754,2377 2099.83,2377 2133.39,2410.56 v2(2166.75,2410.56)
STL_USB_D_N: CN2.2 U1.1 U1.6 U2.32 | length 714.6
  Top Layer w6.1: U2.32@1117.32,2469.53 1141,2469.53 1143.35,2471.87 1173.04,2471.87 1214.17,2513 1393.71,2513 1444.5,2563.79 1444.5,2623.1 1474.4,2653 U1.6@1474.4,2679.72 U1.1@1474.4,2770.28 1474.4,2797 1444.5,2826.9 1444.5,2849 ; 1444.5,2849.91 1450.59,2856 CN2.2@1450.59,2885.79
STL_USB_D_P: CN2.3 R10.1 U1.3 U1.4 U2.33 | length 757.2
  Top Layer w6.1: U2.33@1117.32,2489.21 1141,2489.21 1143.35,2486.87 1166.82,2486.87 1207.95,2528 1387.5,2528 1429.5,2570 1429.5,2623.1 1399.6,2653 U1.4@1399.6,2677.76 ; R10.1@1330,2677.5 1399.35,2677.5 U1.4@1399.6,2677.76 ; CN2.3@1425,2885.79 1425,2856 1429.5,2851.5 ; 1429.5,2849 1429.5,2826.9 1399.6,2797 U1.4@1399.6,2677.76
STLK_RX: JP6.1 SB18.2 U2.13 | length 898.1
  Top Layer w10: JP6.1@100,2200 695,2200 767.68,2272.68 U2.13@841.73,2272.68
  Bottom Layer w10: JP6.1@100,2200 226.25,2200
STLK_TX: JP6.2 SB16.2 U2.12 | length 867.9
  Top Layer w10: JP6.2@100,2300 517.89,2300 561.89,2256 723,2256 782.68,2315.68 U2.12@782.68,2331.73
  Bottom Layer w10: JP6.2@100,2300 226.25,2300
STM_JTCK: SB8.2 U2.37 | length 1077.4
  Top Layer w10: U2.37@1058.27,2607.32 v1(1082.68,2607.32)
  Bottom Layer w10: SB8.2@267.25,2850 267.25,2885.25 282,2900 748,2900 808,2840 978,2840 1082.68,2735.32 v1(1082.68,2607.32)
STM_JTMS: SB12.2 U2.34 | length 964.9
  Top Layer w10: v1(942,2509) 942.1,2508.9 U2.34@1117.32,2508.9
  Bottom Layer w10: SB12.2@267.25,2650 267.25,2600.75 277,2591 907,2591 942,2556 v1(942,2509)
STM_RST: C27.1 JP1.1 U2.7 | length 1031.5
  Top Layer w10: 811.68,2430.94 783.46,2430.94 U2.7@782.68,2430.16 ; 813.23,2430.16 U2.7@782.68,2430.16 ; v1(1141.64,2602) 1111.57,2602 1068.57,2559 910.08,2559 842,2490.92 v1(842,2454) 818.16,2430.16 U2.7@782.68,2430.16
  Bottom Layer w10: C27.1@841.44,2491 841.44,2454.56 v1(842,2454) ; JP1.1@975,2950 1087,2950 1141.64,2895.36 v1(1141.64,2602)
T_JRST: U2.19
T_JTCK: R9.2 SB7.1 U2.15 U2.26 | length 2454.6
  Top Layer w10: R9.2@86.5,2600 149,2600 196,2647 196,2947.99 256.46,3008.44 611.56,3008.44 v1(670,2950) ; U2.15@881.1,2272.68 881.1,2404.1 908,2431 ; v1(1066,2535) 927.67,2535 908,2515.33 908,2431 ; U2.26@1117.32,2351.42 1020.58,2351.42 976,2396 943,2396 908,2431
  Bottom Layer w10: 633.75,2950 v1(670,2950) 756,2950 824,2882 1046,2882 1118.5,2809.5 1118.5,2587.5 v1(1066,2535)
T_JTDI: U2.17
T_JTDO: U2.16
T_JTMS: R16.2 R23.2 SB11.1 U2.27 | length 1863.2
  Top Layer w10: R16.2@86.5,2541 163,2541 260,2638 260,2739.5 319.92,2799.42 620.58,2799.42 v1(670,2750) ; v1@1017,2407 v1(1017,2408.4) 1054.3,2371.1 U2.27@1117.32,2371.1 1118.1,2370.32 1146.33,2370.32 1153.94,2362.71 1153.94,2150.94 1146.44,2143.44 R23.2@1119,2143.44
  Bottom Layer w10: 633.75,2750 v1(670,2750) 950,2750 1017,2683 v1(1017,2408.4)
T_NRST: R17.2 SB19.1 U2.18 | length 1089.9
  Top Layer w10: R17.2@86.5,2482 v1(126.24,2482) ; v1(896.5,2204.75) 924.75,2204.75 940.16,2220.16 U2.18@940.16,2272.68
  Bottom Layer w10: v1(126.24,2482) 227.25,2381 330,2381 528,2183 874.75,2183 v1(896.5,2204.75) 941,2204.75
T_SWDIO_IN: R23.1 U2.25 | length 129.9
  Top Layer w10: U2.25@1117.32,2331.73 1119,2330.06 R23.1@1119,2202.5
T_SWO: R19.2 SB14.1 U2.31 | length 1594.1
  Top Layer w10: R19.2@86.5,2423 239.75,2423 305.75,2489 305.75,2655.35 350.98,2700.58 664.55,2700.58 v1(666.97,2703) ; v1(988,2449) 988.84,2449.84 v1(1074,2449.84) U2.31@1117.32,2449.84
  Bottom Layer w10: v1(666.97,2703) 940.75,2703 988,2655.75 v1(988,2449) ; v1(1074,2449.84) SB14.1@1197.16,2449.84
USB_RENUMN: R13.2 U2.38 | length 976.5
  Top Layer w8: U2.38@1038.58,2607.32 1038.58,2634.58 1053,2649 1099,2649 1121.9,2626.1 v1(1168.78,2626.1) ; R13.2@1803,2677.5 1803,2639.25 v1(1803.25,2639)
  Bottom Layer w8: v1(1168.78,2626.1) 1168.78,2679.78 1209.47,2720.47 1356.88,2720.47 1470.03,2607.32 1771.57,2607.32 v1(1803.25,2639)
VBAT: C30.2 CN7.33 SB26.2 U7.6 | length 2187
  Top Layer w8: CN7.33@-300,200 -374,274 -374,532 -355,551 58.5,551 138.5,471 749,471 784,506 784,612 884.17,712.17 884.17,800.08 860.25,824 v1(819,824) 810.31,824 803.81,817.5 734.58,817.5 733,819.08 U7.6@717.66,819.08
  Bottom Layer w8: v1(819,824) 898.32,824 898.39,823.94 SB26.2@909.76,835.31
VDD: C31.2 C32.2 CN7.5 JP3.1 L1.1 R29.2 SB26.1 SB29.2 U7.8 | length 5273.7
  Top Layer w10: v1@-353,1761 v1(-352,1760) -352,1652 CN7.5@-300,1600 -250.58,1550.58 -149.42,1550.58 v1(-122,1578) ; v1(169.56,1863.56) R29.2@286,1863.56 ; U7.8@717.66,779.71 771.29,779.71 795,756 795,707.9 785.15,698.04 785.15,643.15 v1(785,643) ; v1(807,601) 979.67,773.66 v2(979.67,830.42)
  Bottom Layer w10: v1(-352,1760) -352,1844 -316,1880 -139,1880 -91,1832 138,1832 v1(169.56,1863.56) ; v1(-122,1578) -120,1576 836.84,1576 875,1537.84 JP3.1@875,1475 875,1243.04 1001.04,1117 1068.96,1117 1121,1064.96 1121,860.42 1072.58,812 998.08,812 v2(979.67,830.42) 956.04,854.04 956.04,870.96 940.35,886.65 910,886.65 ; C32.2@732.56,581.62 C31.2@732.56,643 ; C31.2@736.5,643 v1(785,643) 808,620 808,602 v1(807,601) 807,528.5 822,513.5 L1.1@850,513.5 ; L1.1@850,509.5 850,481 834.47,465.47 834.47,419.53 872.5,381.5 1070.5,381.5 1099,353 1179,353 1298,234 1445,234 1523,312 1523,635.53
VIN: C18.2 CN6.8 CN7.24 U5.3 | length 1513.4
  Top Layer w20: CN7.24@-200,700 CN6.8@0,700 67,700 189,822 v2(189,1188) ; v2(525,1200) 523,1202 523,1390 C18.2@699.02,1390
  Bottom Layer w20: v2(189,1188) 201,1200 v2(525,1200)
VIN_5V: C17.2 D4.1 JP2.3 R30.1 U5.2 U5.4 | length 2598.8
  Top Layer w10: R30.1@-2,1629.56 v1(36.56,1629.56) ; v1(165,1629) 198,1629 C17.2@210,1641
  Top Layer w20: C17.2@210,1641 912.8,1641 999.8,1728 1194,1728 1275,1809 1275,1818.17 ; D4.1@1426.87,2257 1426.87,2193.87 1380.87,2147.87 1218.87,2147.87 1181,2110 1181,2021 1275,1927 1275,1818.17 ; JP2.3@1450,1600 1450,1681.84 1408.84,1723 1370.17,1723 1275,1818.17
  Top Layer w40: U5.2@430,1390 U5.4@430,1640
  Bottom Layer w10: v1(36.56,1629.56) 164.44,1629.56 v1(165,1629)
pads on no net: U2.4 U2.11 U2.14 U2.21 U2.22 U2.40 U2.41 U2.42 U2.43 U2.45 U2.46 U6.3 U6.5 U7.0

## Polygon pours and split planes (outlines as drawn)
VIN_5V on Top Layer "VIN_5V" (solid, remove dead copper, pour order 4): 190,1680 176,1680 ccw(c176,1659) 155,1659 155,1616.37 ccw(c161.37,1616.37) 161.37,1610 290,1610 cw(c290,1600) 300,1600 300,1471 ccw(c321,1471) 321,1450 380,1450 cw(c380,1430) 400,1430 400,1358.63 ccw(c410,1358.63) 410,1348.63 453.37,1348.63 ccw(c453.37,1355.25) 460,1355.25 460,1432.56 cw(c477.44,1432.56) 477.44,1450 554.76,1450 ccw(c554.76,1465) 569.76,1465 569.76,1665.24 ccw(c555,1665.24) 555,1680
GND on Top Layer "GND" (solid, remove dead copper, pour order 6): -430.46,-40.95 ccw(c-349.21,-40.95) -349.21,-122.2 ccw(c-349.21,-119.69) -349.17,-122.2 23.77,-122.2 101.77,-200.2 ccw(c103.55,-198.43) 103.55,-200.94 1402.76,-200.94 ccw(c1402.76,-198.43) 1404.54,-200.2 1404.55,-200.19 cw(c1402.76,-198.43) 1404.53,-200.21 1482.54,-122.2 2249.22,-122.2 ccw(c2249.22,-40.95) 2330.47,-40.95 2330.47,2045.67 ccw(c2327.96,2045.67) 2327.96,2048.18 1698.04,2048.18 cw(c1698.04,2065.35) 1698.04,2082.52 2327.93,2082.52 ccw(c2327.96,2085.04) 2330.47,2085.04 2330.47,2970.87 ccw(c2249.22,2970.87) 2249.24,3052.12 ccw(c2249.23,2970.8) 2249.22,3052.12 cw(c2249.22,3049.6) 2249.24,3052.12 2249.22,3052.12 -349.21,3052.12 ccw(c-349.21,3049.6) -349.23,3052.12 cw(c-349.22,2970.8) -349.21,3052.12 -349.23,3052.12 ccw(c-349.21,2970.87) -430.46,2970.87 -430.46,2085.04 ccw(c-427.95,2085.04) -427.92,2082.52 182.29,2082.52 cw(c182.29,2065.35) 199.46,2065.35 cw(c182.29,2065.35) 182.29,2048.18 -427.95,2048.18 ccw(c-427.95,2045.67) -430.46,2045.65
GND on Bottom Layer "GND" (solid, remove dead copper, pour order 2): -430.46,-40.95 ccw(c-349.21,-40.95) -349.21,-122.2 ccw(c-349.21,-119.69) -349.17,-122.2 23.77,-122.2 101.77,-200.2 ccw(c103.55,-198.43) 103.55,-200.94 1402.76,-200.94 ccw(c1402.76,-198.43) 1404.54,-200.2 1404.55,-200.19 cw(c1402.76,-198.43) 1404.53,-200.21 1482.54,-122.2 2249.22,-122.2 ccw(c2249.22,-40.95) 2330.47,-40.95 2330.47,2045.67 ccw(c2327.96,2045.67) 2327.96,2048.18 1698.04,2048.18 cw(c1698.04,2065.35) 1698.04,2082.52 2327.93,2082.52 ccw(c2327.96,2085.04) 2330.47,2085.04 2330.47,2970.87 ccw(c2249.22,2970.87) 2249.24,3052.12 ccw(c2249.23,2970.8) 2249.22,3052.12 cw(c2249.22,3049.6) 2249.24,3052.12 2249.22,3052.12 -349.21,3052.12 ccw(c-349.21,3049.6) -349.23,3052.12 cw(c-349.22,2970.8) -349.21,3052.12 -349.23,3052.12 ccw(c-349.21,2970.87) -430.46,2970.87 -430.46,2085.04 ccw(c-427.95,2085.04) -427.92,2082.52 182.29,2082.52 cw(c182.29,2065.35) 199.46,2065.35 cw(c182.29,2065.35) 182.29,2048.18 -427.95,2048.18 ccw(c-427.95,2045.67) -430.46,2045.65

## Keep-outs
Keep-Out Layer:
  lines w5: 1480.32,-119.75 2249.22,-119.75 ccw(c2249.22,-41.01) 2327.96,-41.01 2327.96,2045.61 1698.04,2045.61 cw(c1698.04,2065.29) 1698.04,2084.98 2327.96,2084.98 2327.96,2970.81 ccw(c2249.22,2970.81) 2249.22,3049.55 -349.21,3049.55 ccw(c-349.21,2970.8) -427.95,2970.8 -427.95,2084.98 182.29,2084.98 cw(c182.29,2065.29) 182.29,2045.61 -427.95,2045.61 -427.95,-41.01 ccw(c-349.21,-41.01) -349.21,-119.75 19.69,-119.75 24.81,-119.75 103.55,-198.49 1402.76,-198.49 ; 1481.5,-119.75 1402.76,-198.49 ; 1402.76,-198.49 1402.76,-198.49 ; 320.09,2045.61 cw(c320.09,2065.29) 320.09,2084.98 1068.12,2084.98 cw(c1068.12,2065.29) 1068.12,2045.61 320.09,2045.61 ; 1250.01,2045.61 cw(c1250.01,2065.29) 1250.01,2084.98 1538.59,2084.98 cw(c1538.59,2065.29) 1538.59,2045.61 1250.01,2045.61

## Silkscreen, mask and mechanical layers (free items; w line width, h text height)
Top Overlay:
  drawing of 2505 lines, arcs and shapes, not listed
  text "USB_" at 1601,3000 h39.37
  text "STLINK" at 1743.42,3000 h39.37
  text "STLK_RST" at 1047.05,2900 h30
  text "GND" at 2130,2811 h39.37 r90
  text "GND" at -185,2807.36 h39.37 r90
  text "COM" at 2065,2805.58 h39.37 r90
  text "NUCLEO" at 624.65,2700 h40 r90
  text "ST-LINK" at 316,2685 h40 r90
  text "SWD" at -213,2585 h40 r270
  text "TX" at 169,2279.3 h40
  text "RX" at 170,2179.3 h40
  text "USER" at 923,1825 h40 r90
  text "RESET" at 1013,1824 h40 r90
  text "SCL/D15" at 1613.22,1723 h40
  text "CHG" at 1265,1665 h39.37 r90
  text "E5V" at 1365.04,1665 h39.37 r90
  text "VIN" at 1469.98,1665 h39.37 r90
  text "STLK" at 1573.54,1665 h39.37 r90
  text "SDA/D14" at 1627,1630 h35
  text "E5V" at -138,1571 h40
  text "AVDD" at 1699.17,1530 h40
  text "GND" at -140,1483 h40
  text "GND" at 1734.78,1436 h40
  text "IDD" at 897,1361 h39.37
  text "SCK/D13" at 1604.9,1334 h40
  text "IOREF" at 63,1280 h40
  text "MISO/D12" at 1590.24,1237.5 h40
  text "MB1360C" at 248,1190 h40
  text "NRST" at 63,1170 h40
  text "PWM/MOSI/D11" at 1454.46,1130 h40
  text "www.st.com/stm32nucleo" at 246,1117 h59.06
  text "3V3" at 63,1080 h40
  text "PWM/CS/D10" at 1487.6,1030 h40
  text "5V" at 63,973 h40
  text "PWM/D9" at 1623.57,930 h40
  text "GND" at 63,876 h40
  text "D8" at 1774.58,830 h40
  text "POWER" at 222,820 h40 r90
  text "GND" at 63,779 h40
  text "VIN" at 63,678.09 h40
  text "D7" at 1774.58,670 h40
  text "PWM/D6" at 1623.57,570 h40
  text "A0" at 63,470 h40
  text "PWM/D5" at 1621.66,470 h40
  text "A1" at 63,370 h40
  text "D4" at 1772.68,370 h40
  text "A2" at 63,270 h40
  text "PWM/D3" at 1621.66,270 h40
  text "AIN" at 195,216 h40 r90
  text "A3" at 63,170 h40
  text "D2" at 1769.58,170 h40
  text "TX/D1" at 1690.36,79.72 h40
  text "A4" at 63,70 h40
  text "RX/D0" at 1669.03,-25.59 h40
  text "A5" at 63,-30 h40
Bottom Overlay:
  drawing of 286 lines, arcs and shapes, not listed
  text "JP1" at 1143,2925 h40
  text "CN2" at 1442,2778 h40
  text "JP4" at -245,2695.95 h40
  text "JP5" at 2255,2695.95 h40
  text "SWD" at -180,2530 h40 r90
  text "RESERVED" at 341.2,2530 h40
  text "CN4" at 492,2530 h40
  text "DEFAULT" at 780,2530 h40
  text "MCO" at 1146.85,2302 h39.37
  text "TX" at 38.98,2275 h40
  text "CN11" at -303,2189.96 h40 r180
  text "RX" at 38.98,2182 h40
  text "JP6" at 155,2095.95 h40
  text "CHG" at 1260,1670 h39.37 r90
  text "E5V" at 1334.45,1670 h39.37 r270
  text "VIN" at 1427.16,1670 h39.37 r270
  text "STLK" at 1535.93,1670 h39.37 r270
  text "JP3" at 983,1540 h40
  text "JP2" at 1179,1527 h40
  text "RoHS" at 565.9,1331.26 h62.99
  text "COMPLIANT" at 581.65,1276.14 h31.5
  text "2002/95/EC" at 601.33,1224.96 h31.5
  text "CN5" at 1951,760 h40
  text "CN6" at 49,583 h40
  text "CN7" at -190,-102 h40
  text "CN8" at 55,-102 h40
  text "CN9" at 1949,-102 h40
  text "CN10" at 2219,-102 h40
M1-Board Shape:
  lines w5: 1480.32,-119.69 2249.22,-119.69 ccw(c2249.22,-40.95) 2327.96,-40.95 2327.96,2045.67 1698.04,2045.67 cw(c1698.04,2065.35) 1698.04,2085.04 2327.96,2085.04 2327.96,2970.87 ccw(c2249.22,2970.87) 2249.22,3049.61 -349.21,3049.61 ccw(c-349.21,2970.87) -427.95,2970.87 -427.95,2085.04 182.29,2085.04 cw(c182.29,2065.35) 182.29,2045.67 -427.95,2045.67 -427.95,-40.95 ccw(c-349.21,-40.95) -349.21,-119.69 19.69,-119.69 24.81,-119.69 103.55,-198.43 1402.76,-198.43 ; 1481.5,-119.68 1402.76,-198.43 ; 1402.76,-198.43 1402.76,-198.43 ; 320.08,2045.67 cw(c320.08,2065.35) 320.08,2085.04 1068.11,2085.04 cw(c1068.11,2065.35) 1068.11,2045.67 320.08,2045.67 ; 1250,2045.67 cw(c1250,2065.35) 1250,2085.04 1538.59,2085.04 cw(c1538.59,2065.35) 1538.59,2045.67 1250,2045.67
  text "MB1360C" at -80,3180 h40
Drill Drawing:
  lines w9.84: 2709.25,1107.76 7433.66,1107.76 ; 2709.25,1422.72 7433.66,1422.72 ; 2669.88,449.09 ccw(c2719.88,449.09) 2719.88,399.09 2787.99,399.09 7423.03,399.09 ccw(c7423.03,449.09) 7473.03,449.09 7473.03,477.83 7473.03,1687.68 ccw(c7423.03,1687.68) 7423.03,1737.68 3063.58,1737.68 2719.88,1737.68 ccw(c2719.88,1687.68) 2669.88,1687.68 2669.88,1619.57 2669.88,449.09
  lines w19.68: 3142.32,-280.04 3142.32,-270.2 ; 3142.32,-240.67 3142.32,-43.82 ; 6764.37,-280.04 6764.37,-270.2 ; 6764.37,-240.67 6764.37,-43.82 ; 2984.84,-319.41 3299.8,-319.41 3142.32,34.92 2984.84,-319.41 ; 6606.89,-319.41 6764.37,34.92 6921.85,-319.41 6606.89,-319.41
  text ".Legend" at 2695.87,1908.57 h60
  text "Layer Stack Up Detail for: MB1360B.PcbDoc" at 3457.28,1540.83 h118.11
  text "Layer" at 2748.62,1304.61 h59.06
  text "Gerber" at 3772.24,1304.61 h59.06
  text "Copper" at 4441.54,1304.61 h59.06
  text "Dielectric" at 5071.46,1304.61 h59.06
  text "Dielectric" at 5701.38,1304.61 h59.06
  text "Dielectric" at 6449.41,1304.61 h59.06
  text "Dielectric" at 7039.96,1304.61 h59.06
  text "Name" at 2748.62,1186.5 h59.06
  text "Document" at 3772.24,1186.5 h59.06
  text "Thickness" at 4441.54,1186.5 h59.06
  text "Height" at 5071.46,1186.5 h59.06
  text "Material" at 5701.38,1186.5 h59.06
  text "Constant" at 6449.41,1186.5 h59.06
  text "Type" at 7039.96,1186.5 h59.06
  text "Top Solder Mask" at 2748.62,989.65 h59.06
  text "(.GTS)" at 3772.24,989.65 h59.06
  text "0.4mil" at 5071.46,989.65 h59.06
  text "Solder Resist" at 5701.38,989.65 h59.06
  text "3.50" at 6488.78,989.65 h59.06
  text "Top Layer" at 2748.62,832.17 h59.06
  text "(.GTL)" at 3772.24,832.17 h59.06
  text "1.4mil" at 4480.91,832.17 h59.06
  text "59.055mil" at 5071.46,753.43 h59.06
  text "FR-4" at 5701.38,753.43 h59.06
  text "4.80" at 6488.78,753.43 h59.06
  text "Core" at 7079.33,753.43 h59.06
  text "Bottom Layer" at 2748.62,674.69 h59.06
  text "(.GBL)" at 3772.24,674.69 h59.06
  text "1.4mil" at 4480.91,674.69 h59.06
  text "Bottom Solder Mask" at 2748.62,517.2 h59.06
  text "(.GBS)" at 3772.24,517.2 h59.06
  text "0.4mil" at 5071.46,517.2 h59.06
  text "Solder Resist" at 5701.38,517.2 h59.06
  text "3.50" at 6488.78,517.2 h59.06
  text "Notes:" at 3590.16,45.75 h98.43
  text "Silkscreen color : Blue ink PANTONE 2955" at 3590.16,-111.73 h98.43
  text "Solder resist color : White" at 3590.16,-269.21 h98.43
  text "Plating type : lead Gold" at 3590.16,-426.69 h98.43

## Dimensions
-349.21,3049.55 to 103.55,-198.49 on Drill Drawing
-427.95,2970.8 to 2327.96,2970.81 on Drill Drawing

## Text inside footprints (layer, text, board x,y; h text height)
CN2: Top Overlay "1" at 1471,2812 h59.06; Top Overlay "5" at 1362,2811 h59.06; M14-Top Assembly "1" at 1481.35,2902.14 h59.06 r180; M14-Top Assembly "5" at 1377.75,2902.14 h59.06 r180; M7-Top Info "EDGE" at 1245.37,3068.28 h59.06 r180; M7-Top Info "PCB" at 1647.46,3068.28 h59.06 r180